# Altium PCB PCB1_v2.PcbDoc
Units mm, origin at the board's own origin, x right, y up, seen from the top; angles counter-clockwise.
Board outline 20 x 20 mm, 2 copper layers (Top Layer, Bottom Layer); 25 components, 26 nets, 108 pads, 20 vias.
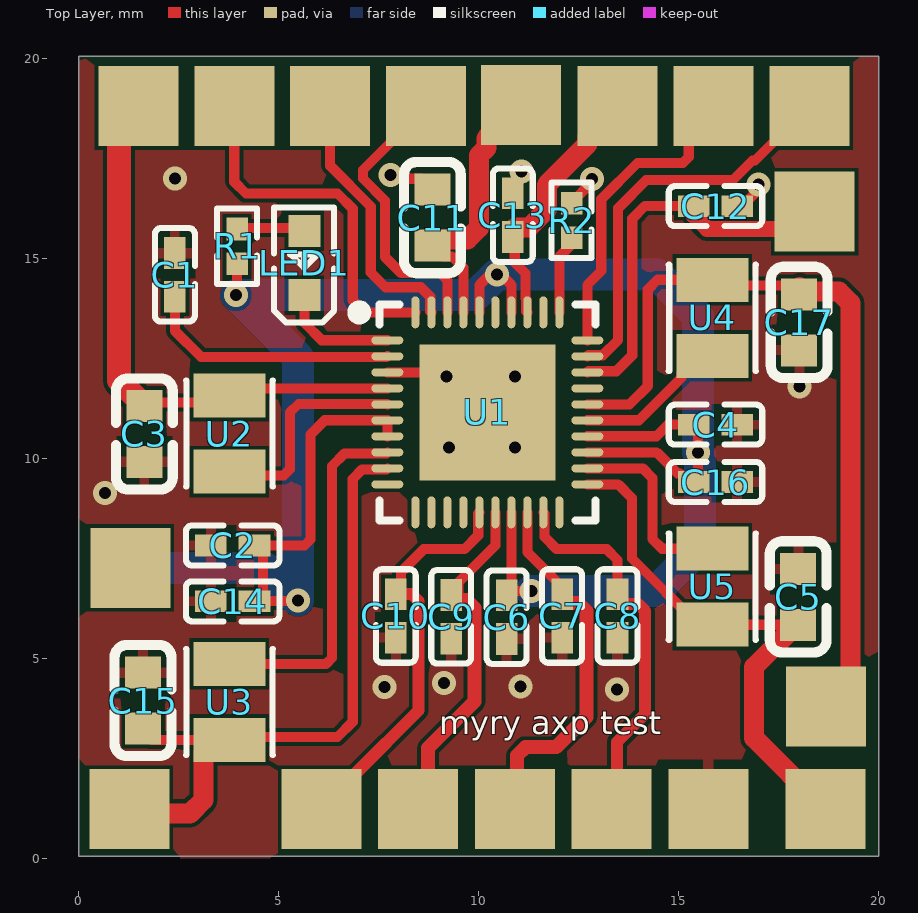
[diagram p0: Top Layer view]
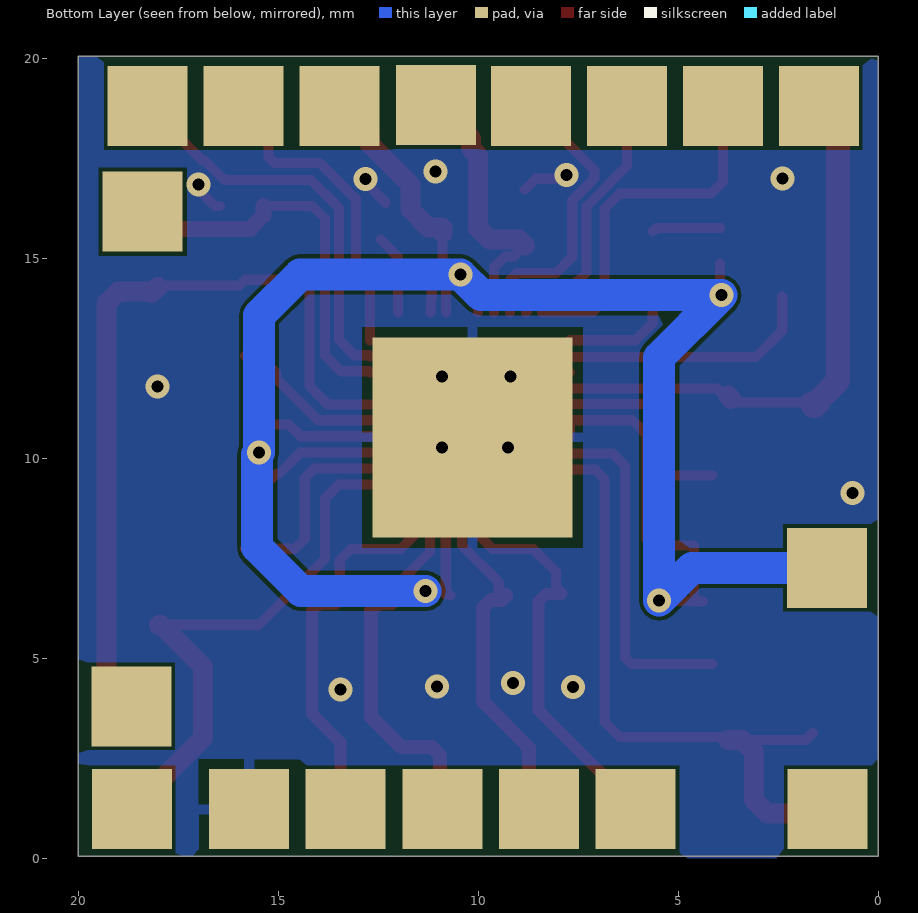
[diagram p1: Bottom Layer view, seen from below]
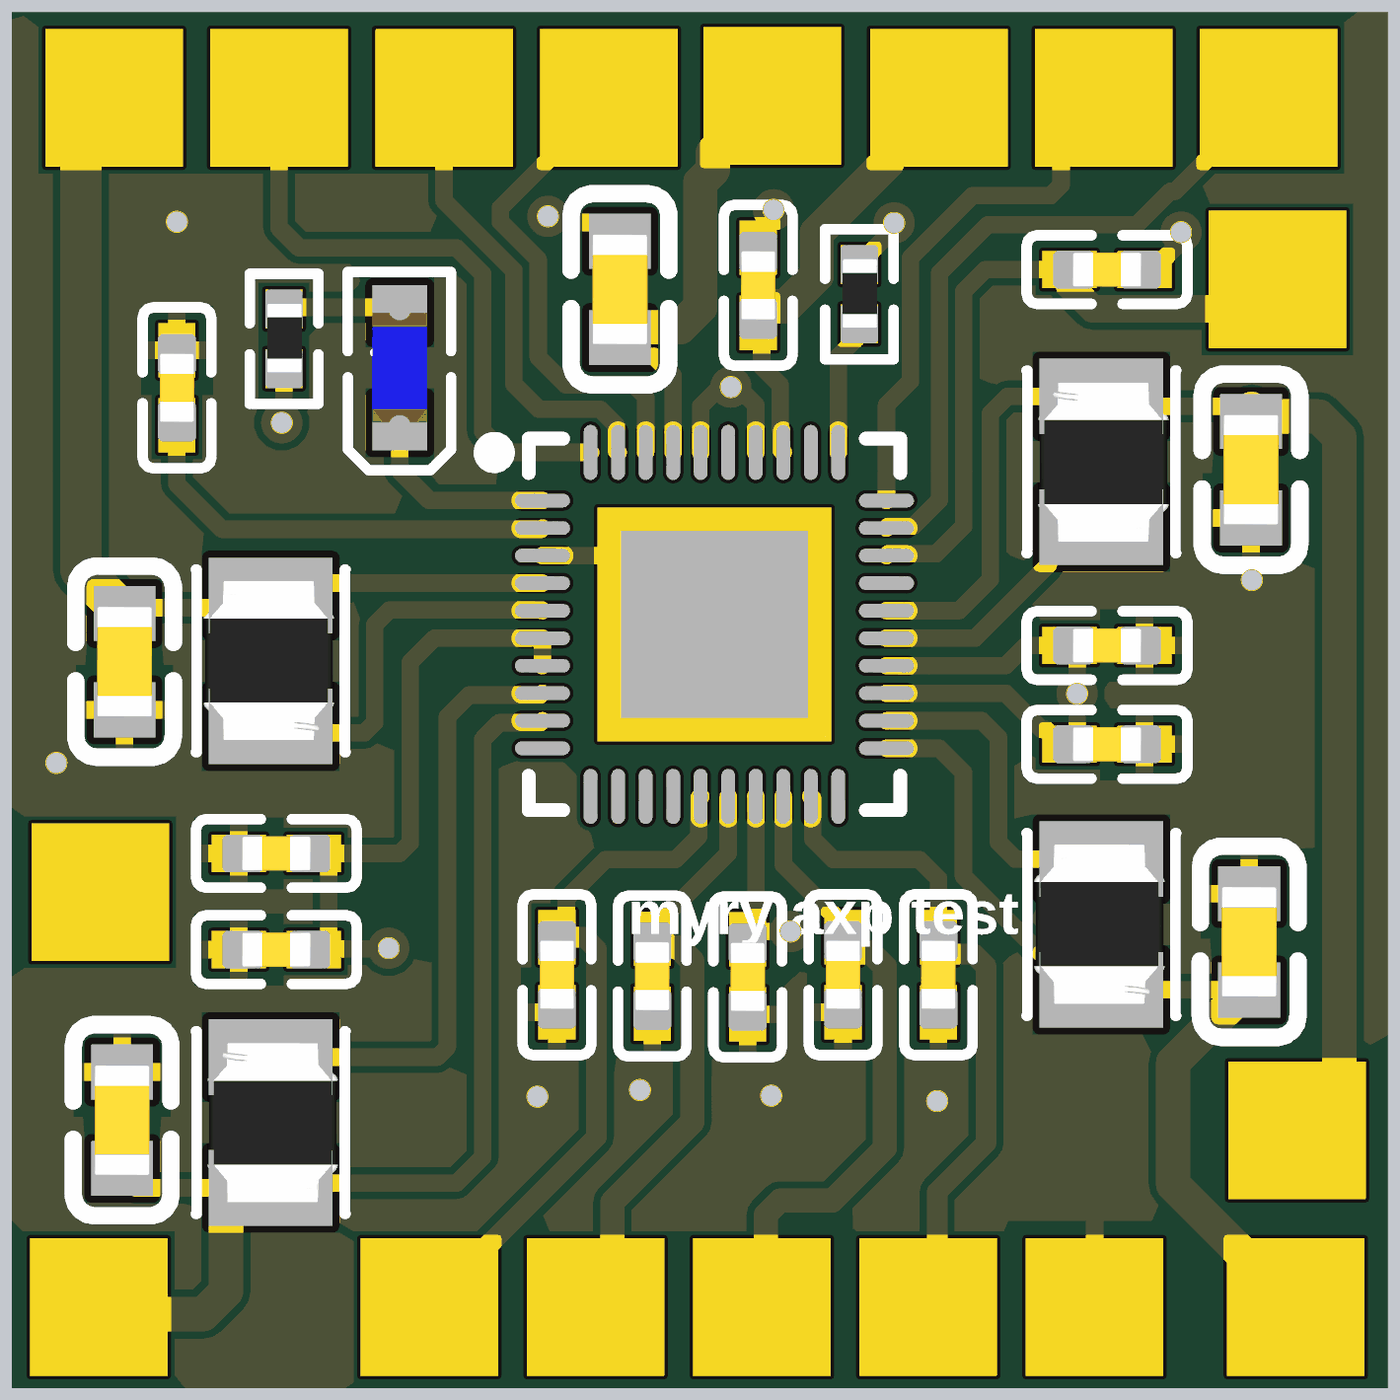
[diagram p2: 3D render of the assembled board from above, using the file's embedded part models]

## Layer stack, top to bottom
Top Solder: solder mask 0.0102, Solder Resist, Dk 3.5
Top Layer: signal copper 0.0356
Dielectric 1: dielectric 0.32, FR-4, Dk 4.8
Bottom Layer: signal copper 0.0356
Bottom Solder: solder mask 0.0102, Solder Resist, Dk 3.5

## Board outline
0.011,0.065 0.011,20.065 20.011,20.065 20.011,0.065

## Design rules (kind name [scope] priority, off if disabled: settings)
Clearance [All] p1: gap=0.1 ignorepadtopadclearanceinfootprint=FALSE
MinimumSolderMaskSliver [All] p1: minsoldermaskwidth=0.1
PolygonConnect [All] p1: connectstyle=Relief reliefconductorwidth=0.254 reliefentries=4 polygonreliefangle="90 Angle" airgapwidth=0.254
RoutingVias [All] p1: holewidth=0.711 width=1.27 viastyle="Through Hole" minholewidth=0.3 minwidth=0.6 maxholewidth=0.711 maxwidth=1.27
SilkToSilkClearance [All] p1: silktosilkclearance=0.1
SilkToSolderMaskClearance [IsPad] p1: minsilkscreentomaskgap=0.1 clearancetoexposedcopper=TRUE
SolderMaskExpansion [All] p1: expansion=0.102 istentingtop=FALSE
SupplyNets "Schematic Supply Nets" [InNet('GND')] p1: voltage=0.000
Width [All] p1: maxlimit=1 minlimit=0.254 preferedwidth=0.5
27 further rules are at their usual default settings.

## Components (designator, comment, footprint, x,y, rotation, side; value= is the part's Value field where it differs from the comment)
C1 "1uF" C0402 2.413,14.605 r270 top
C2 "1uF" C0402 3.858,7.838 r0 top
C3 "22uF" C0603 1.651,10.626 r90 top
C4 "1uF" C0402 15.929,10.86 r180 top
C5 "22uF" C0603 17.995,6.554 r270 top
C6 "1uF" C0402 10.707,6.044 r90 top
C7 "2.2uF" C0402 12.093,6.076 r90 top
C8 "2.2uF" C0402 13.479,6.076 r90 top
C9 "2.2uF" C0402 9.321,6.055 r90 top
C10 "2.2uF" C0402 7.935,6.076 r90 top
C11 "10uF" C0603 8.851,16.035 r270 top
C12 "1uF" C0402 15.929,16.323 r180 top
C13 "2.2uF" C0402 10.861,16.094 r270 top
C14 "1uF" C0402 3.858,6.44 r0 top
C15 "22uF" C0603 1.616,3.961 r270 top
C16 "1uF" C0402 15.929,9.425 r180 top
C17 "22uF" C0603 18.021,13.415 r90 top
LED1 "KT-0603B" LED0603-BL 5.651,15.024 r90 top
R1 "R0402" R0402 3.969,15.317 r90 top
R2 "R0402" R0402 12.33,15.964 r90 top
U1 "AXP2101" QFN-40_L5.0-W5.0-P0.40-TL-EP3.4 10.225,11.167 r0 top
U2 "WPN252012H1R0MT" IND-SMD_L2.5-W2.0_WPN252012H 3.776,10.636 r270 top
U3 "WPN252012H1R0MT" IND-SMD_L2.5-W2.0_WPN252012H 3.776,3.928 r90 top
U4 "WPN252012H1R0MT" IND-SMD_L2.5-W2.0_WPN252012H 15.848,13.53 r90 top
U5 "WPN252012H1R0MT" IND-SMD_L2.5-W2.0_WPN252012H 15.848,6.806 r270 top

## Footprints (in the part's own frame and the unit in brackets; to place one, negate y for a bottom-side part, rotate by r counter-clockwise, add the part's x,y. Pads: shape width x height; smd on the part's side, far side on the other; paste and mask are expansions set on the pad)
C0402 [mm]
  rect 0.79x0.54 smd paste-100 mask+0.051: 1(-0.545,0) 2(0.545,0)
  silkscreen extent -1.17,-0.5 1.17,0.5, body extent -0.5,-0.25 0.5,0.25, height 0.5
C0603 [mm]
  rect 0.8x0.9 smd: 1(-0.7,0) 2(0.7,0)
  silkscreen extent -1.39,-0.71 1.39,0.71, body extent -0.8,-0.4 0.8,0.4, height 0.5
IND-SMD_L2.5-W2.0_WPN252012H [mm]
  rect 1.1x1.8 smd: 1(-0.95,0) 2(0.95,0)
  silkscreen extent -1.33,-1.09 1.33,1.09, body extent -1.25,-0.98 1.25,0.92, height 0.08
LED0603-BL [mm]
  rect 0.8x0.8 smd: 1(-0.926,0) 2(0.672,0)
  silkscreen extent -1.62,-0.75 1.26,0.76, body extent -0.93,-0.4 0.67,0.4, height 0.53
QFN-40_L5.0-W5.0-P0.40-TL-EP3.4 [mm]
  oval 0.8x0.2 smd paste-100 mask+0.05: 1(-2.5,1.8) 2(-2.5,1.4) 3(-2.5,1) 4(-2.5,0.6) 5(-2.5,0.2) 6(-2.5,-0.2) 7(-2.5,-0.6) 8(-2.5,-1) 9(-2.5,-1.4) 10(-2.5,-1.8) 21(2.5,-1.8) 22(2.5,-1.4) 23(2.5,-1) 24(2.5,-0.6) 25(2.5,-0.2) 26(2.5,0.2) 27(2.5,0.6) 28(2.5,1) 29(2.5,1.4) 30(2.5,1.8)
  oval 0.2x0.8 smd paste-100 mask+0.05: 11(-1.8,-2.5) 12(-1.4,-2.5) 13(-1,-2.5) 14(-0.6,-2.5) 15(-0.2,-2.5) 16(0.2,-2.5) 17(0.6,-2.5) 18(1,-2.5) 19(1.4,-2.5) 20(1.8,-2.5) 31(1.8,2.5) 32(1.4,2.5) 33(1,2.5) 34(0.6,2.5) 35(0.2,2.5) 36(-0.2,2.5) 37(-0.6,2.5) 38(-1,2.5) 39(-1.4,2.5) 40(-1.8,2.5)
  rect 3.4x3.4 smd paste-100 mask+0.05: 41(0,0)
  silkscreen extent -3.35,-2.7 2.7,2.7, body extent -2.54,-2.54 2.54,2.54, height 0.38
R0402 [mm]
  rect 0.566x0.54 smd paste-100 mask+0.051: 1(-0.433,0) 2(0.433,0)
  silkscreen extent -0.94,-0.5 0.94,0.5, body extent -0.49,-0.26 0.51,0.24, height 0.35

## Part data
C1 C2 C4 C6 C7 C8 C9 C10 C12 C13 C14 C16: library part C0402
C3 C5 C11 C15 C17: library part C0603
U2 U3 U4 U5: "1uH"

## Free pads (board coordinates)
  rect 2x2 all layers, no hole mask+0.05: ""(1.278,1.245) ""(1.298,7.276) ""(1.501,18.82) ""(3.898,18.82) ""(6.079,1.245) ""(6.294,18.82) ""(8.496,1.245) ""(8.691,18.82) ""(10.914,1.245) ""(11.065,18.848) ""(13.331,1.245) ""(13.484,18.82) ""(15.748,1.245) ""(15.881,18.82) ""(18.278,18.82) ""(18.408,16.182) ""(18.674,1.245) ""(18.69,3.816)
  rect 5x5 smd far side mask+0.05: ""(10.16,10.541)

## Via types
v1: diameter 0.6, hole 0.3, Top Layer to Bottom Layer, tented both sides, 20 vias

## Nets (pads, with @x,y where several pads share a name; then routed paths per layer and width w, separated by ;. In a path a pad name is that pad's centre, name@x,y a point inside that pad or via, vN(x,y) a via of type N, cw(c..) or ccw(c..) an arc to the next point about the centre after c; other vN are vias at no path point)
ALDO1: C7.2 pad.@10.914,1.245 U1.18 | length 9.3
  Top Layer w0.254: U1.18 11.225,7.675 C7.2@12.154,6.746
  Top Layer w0.35: pad.@10.914,1.245 10.971,1.303 10.971,2.589 11.176,2.794 11.938,2.794 12.7,3.556 12.7,6.196 12.495,6.401 12.188,6.401 12.093,6.496 C7.2
ALDO2: C8.2 pad.@13.331,1.245 U1.19 | length 9.8
  Top Layer w0.254: U1.19 11.652,8.639 11.652,8.053 11.958,7.747 13.208,7.747 13.479,7.476 C8.2
  Top Layer w0.3: pad.@13.331,1.245 13.462,1.377 13.462,2.921 14.171,3.63 14.171,6.2 13.995,6.376 13.599,6.376 13.479,6.496 C8.2
ALDO3: C9.2 pad.@8.496,1.245 U1.16 | length 8.8
  Top Layer w0.254: C9.2@9.503,6.621 9.503,6.916 10.424,7.837 U1.16
  Top Layer w0.35: pad.@8.496,1.245 8.741,1.49 8.741,2.772 9.902,3.933 9.902,6.276 9.701,6.477 9.416,6.477 9.321,6.572 C9.2
ALDO4: C10.2 pad.@6.079,1.245 U1.15 | length 10.3
  Top Layer w0.254: C10.2@7.911,6.645 8.07,6.804 8.07,7.181 8.636,7.747 9.652,7.747 9.998,8.093 9.998,8.639 U1.15
  Top Layer w0.3: pad.@6.079,1.245 6.929,2.095 6.929,2.136 8.509,3.716 8.509,6.445 8.333,6.621 C10.2
DCDC1: C5.2 pad.@18.674,1.245 U1.21 U5.2 | length 13.4
  Top Layer w0.254: U1.21 13.494,9.366 13.843,9.017 13.843,7.511 15.498,5.856 U5.2 17.993,5.856 C5.2
  Top Layer w0.5: C5.2 17.945,5.854 16.891,4.8 16.891,3.028 pad.@18.674,1.245
DCDC2: C17.2 pad.@18.69,3.816 U1.26 U4.2 | length 19.9
  Top Layer w0.254: U1.26 13.779,11.366 14.235,11.822 14.235,14.235 14.48,14.48 U4.2 15.991,14.336 17.8,14.336 C17.2
  Top Layer w0.5: C17.2@18.032,14.297 C17.2@18.182,14.147 ; C17.2@18.19,14.188 19.011,14.188 19.304,13.895 19.304,4.43 pad.@18.69,3.816
DCDC3: C3.2 pad.@1.501,18.82 U1.4 U2.1 | length 14.4
  Top Layer w0.254: C3.2@1.734,11.408 3.694,11.408 4.052,11.767 U1.4
  Top Layer w0.5: C3.2 C3.2@1.734,11.408 ; U2.1@3.694,11.504 U2.1
  Top Layer w0.6: pad.@1.501,18.82 1.016,18.335 1.016,11.96 1.501,11.476 1.501,11.426 1.601,11.326 C3.2
DCDC4: C15.2 pad.@1.278,1.245 U1.9 U3.1 | length 16.2
  Top Layer w0.254: C15.2@1.651,3.143 1.816,2.978 U3.1@3.426,2.978 ; U3.1 3.847,3.048 6.477,3.048 6.858,3.429 6.858,9.499 7.098,9.74 7.698,9.74 U1.9
  Top Layer w0.5: pad.@1.278,1.245 1.38,1.143 2.794,1.143 3.126,1.475 3.126,2.678 3.426,2.978 U3.1
EN: pad.@18.278,18.82 U1.29 | length 10.1
  Top Layer w0.254: U1.29 12.752,12.594 13.114,12.594 13.494,12.974 13.494,16.269 14.199,16.974 16.367,16.974 16.853,17.461 16.918,17.461 18.26,18.803 pad.@18.26,18.82
GND: C1.1 C2.1 C3.1 C4.1 C5.1 C6.1 C7.1 C8.1 C9.1 C10.1 C11.1 C12.1 C13.1 C14.1 C15.1 C16.1 C17.1 pad.@10.16,10.541 pad.@15.748,1.245 R2.2 U1.3 U1.41 | length 4.4
  Top Layer w0.254: U1.3 9.103,12.167 v1(9.21,12.06) ; v1(7.805,17.097) 7.898,17.097 7.987,17.008 8.578,17.008 C11.1 ; R2.2 12.33,16.41 12.835,16.915 v1(12.835,17) ; C12.1 16.599,16.323 16.939,16.662 16.939,16.8 v1(17.005,16.867)
  other v1: 13.461,4.24 7.651,4.304 11.049,4.318 9.142,4.4 0.661,9.154 9.271,10.287 10.922,10.287 18.034,11.811 10.922,12.065 2.413,17.018 11.082,17.192
IRQ: pad.@8.691,18.82 U1.38 | length 7.2
  Top Layer w0.254: pad.@8.691,18.8 8.67,18.8 7.818,17.947 7.818,17.927 7.115,17.223 7.115,17.013 7.664,16.464 7.664,15.054 8.07,14.647 9.053,14.647 9.225,14.476 U1.38
NetC1_2: C1.2 U1.2 | length 6.4
  Top Layer w0.254: C1.2 2.413,13.208 3.072,12.549 7.707,12.549 U1.2
NetLED1_1: LED1.1 U1.1 | length 3
  Top Layer w0.254: LED1.1 5.652,13.398 6.083,12.967 U1.1
NetLED1_2: LED1.2 R1.2 | length 1.7
  Top Layer w0.254: R1.2@3.955,15.775 5.573,15.775 LED1.2
NetR2_1: R2.1 U1.31 | length 2
  Top Layer w0.254: U1.31 12.025,15.06 12.446,15.481 R2.1@12.446,15.494
NetU1_5: U1.5 U2.2 | length 5.1
  Top Layer w0.254: U2.2@4.157,9.591 5.139,9.591 5.288,9.74 5.288,11.16 5.504,11.377 7.714,11.377 U1.5
NetU1_8: U1.8 U3.2 | length 8.6
  Top Layer w0.254: U3.2@4.157,4.878 6.194,4.878 6.343,5.026 6.343,9.825 6.657,10.14 7.698,10.14 U1.8
NetU1_22: U1.22 U5.1 | length 4.8
  Top Layer w0.254: U1.22 14.109,9.767 14.351,9.525 14.351,8.001 14.596,7.756 U5.1
NetU1_25: U1.25 U4.1 | length 3.9
  Top Layer w0.254: U1.25 14.015,10.967 15.075,12.027 15.075,12.157 15.498,12.58 U4.1
ON: pad.@15.881,18.82 U1.30 | length 7.8
  Top Layer w0.254: U1.30 12.725,14.352 13.074,14.701 13.074,16.493 13.979,17.399 15.113,17.399 15.262,17.548 15.262,18.201 pad.@15.881,18.82
SCL: pad.@6.294,18.82 U1.39 | length 6.7
  Top Layer w0.254: pad.@6.294,18.82 6.294,17.328 7.31,16.312 7.31,14.661 7.678,14.293 8.56,14.293 8.797,14.056 8.797,13.693 U1.39
SDA: pad.@3.898,18.82 U1.40 | length 9.1
  Top Layer w0.254: pad.@3.898,18.82 3.898,16.93 4.191,16.637 6.477,16.637 6.858,16.256 6.858,13.97 7.162,13.666 U1.40
VBAT: C13.2 pad.@13.484,18.82 U1.33 | length 6.5
  Top Layer w0.254: C13.2@10.911,15.644 10.911,14.912 11.178,14.645 11.178,14.013 11.198,13.993 11.198,13.693 U1.33
  Top Layer w0.5: C13.2@10.911,15.644 10.911,15.769 10.931,15.789 11.264,15.789 11.71,16.235 11.71,16.854 12.734,17.878 12.734,18.07 pad.@13.484,18.82
VBUS: C11.2 pad.@11.065,18.848 U1.37 | length 6.8
  Top Layer w0.254: C11.2 9.124,15.062 9.344,15.062 9.625,14.781 U1.37
  Top Layer w0.5: C11.2 9.001,15.485 9.726,15.485 10.019,15.778 10.019,17.59 10.2,17.772 10.2,18.016 10.717,18.532 pad.@10.961,18.532
VRTC: C12.2 pad.@18.408,16.182 U1.28 | length 10
  Top Layer w0.254: U1.28 12.752,12.194 13.45,12.194 13.848,12.592 13.848,16.007 14.164,16.323 C12.2
  Top Layer w0.4: C12.2 15.384,16.088 15.719,15.753 17.666,15.753 pad.@18.322,16.409
VSYS: C2.2 C4.2 C6.2 C14.2 C16.2 pad.@1.298,7.276 R1.1 U1.6 U1.7 U1.17 U1.23 U1.24 U1.34 U1.36 | length 57.6
  Top Layer w0.254: pad.@1.298,7.276 pad.@1.434,7.139 ; v1(3.937,14.097) 3.969,14.129 R1.1 ; C14.2 C14.2@4.62,6.44 ; v1(5.491,6.461) 5.48,6.451 4.631,6.451 C14.2@4.62,6.44 ; U1.7 U1.6 6.159,10.967 5.801,10.609 5.801,7.987 5.652,7.838 4.62,7.838 C14.2@4.62,6.44 ; U1.36 10.025,14.343 10.25,14.568 10.415,14.568 v1(10.462,14.615) 10.509,14.568 10.609,14.568 10.824,14.353 U1.34 ; C6.2 10.822,6.704 C6.2@10.826,6.704 ; U1.17 10.826,8.665 C6.2@10.826,6.704 ; C6.2@10.828,6.621 10.826,6.623 C6.2@10.826,6.704 ; v1(11.331,6.704) C6.2@10.826,6.704 ; U1.23 14.456,10.167 14.984,9.639 15.045,9.639 15.259,9.425 C16.2 15.494,9.535 v1(15.494,10.16) 15.494,10.75 C4.2 14.748,10.86 14.455,10.567 U1.24
  Bottom Layer w0.8: pad.@1.298,7.276 4.676,7.276 v1(5.491,6.461) 5.491,12.543 v1(3.937,14.097) 9.944,14.097 v1(10.462,14.615) 14.468,14.615 15.494,13.589 v1(15.494,10.16) ; v1(11.331,6.704) 14.451,6.704 15.542,7.795 v1@15.542,10.112
pads on no net: U1.10 U1.11 U1.12 U1.13 U1.14 U1.20 U1.27 U1.32 U1.35

## Polygon pours and split planes (outlines as drawn)
GND on Bottom Layer "GND_L02_P001" (solid, pour order 1): 0,0 0,20.066 20.008,20.066 20.012,20.062 20.012,0.069
GND on Top Layer "GND_L01_P000" (solid, pour order 0): 0,0 0,20.066 20.008,20.066 20.012,20.062 20.012,0.069

## Silkscreen, mask and mechanical layers (free items; w line width, h text height)
Top Overlay:
  text "myry axp test" at 9.017,2.921 h1